# Altium PCB Mona-SD.PcbDoc
Units mm, origin at the board's own origin, x right, y up, seen from the top; angles counter-clockwise.
Board outline 152.4 x 101.6 mm, 2 copper layers (Top Layer, Bottom Layer); 8 components, 0 nets, 45 pads, 4 vias.
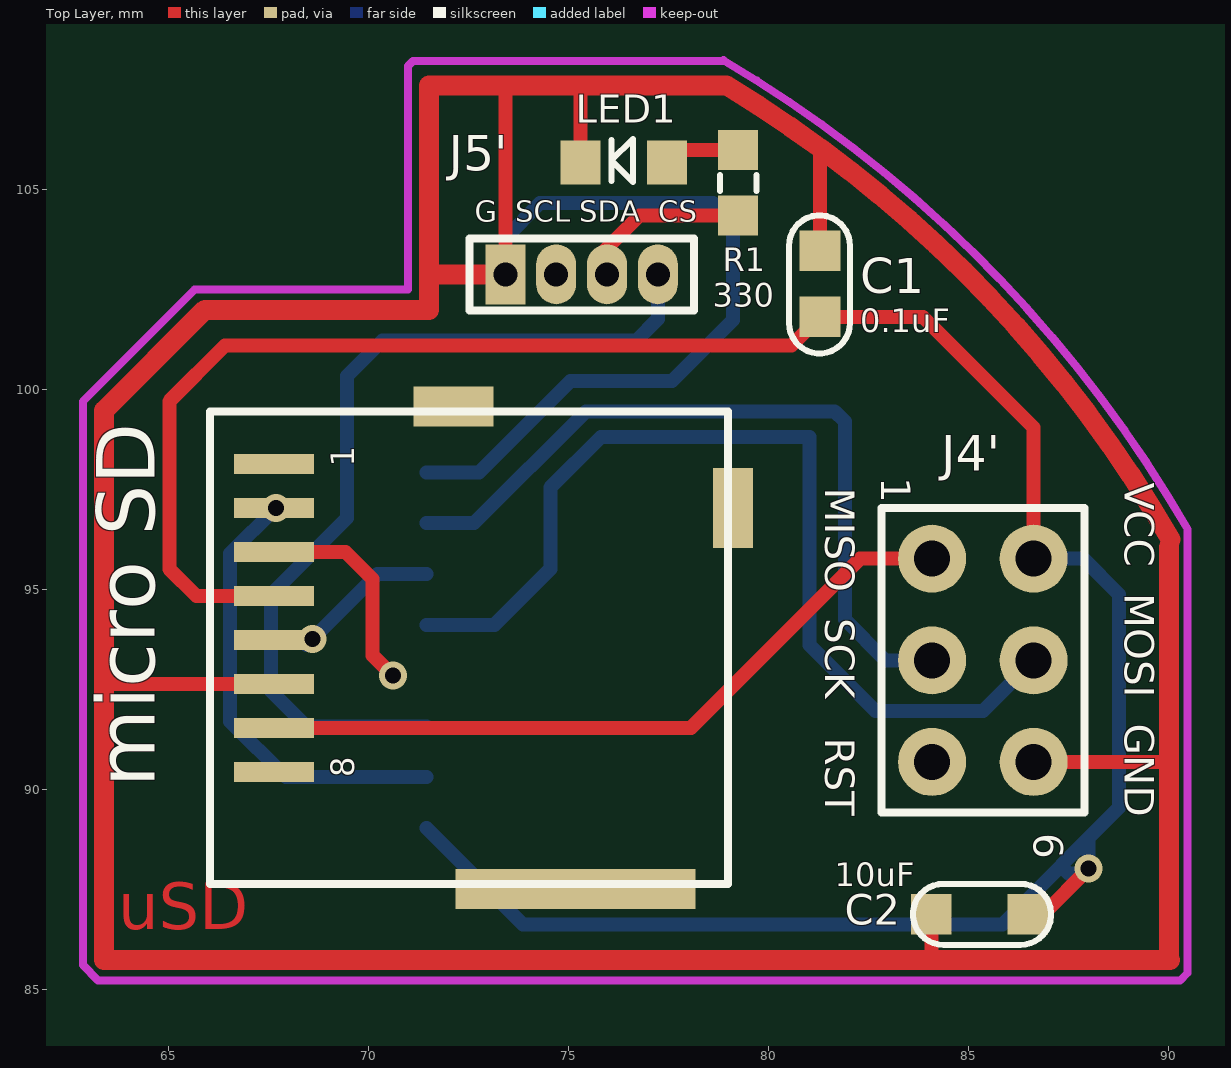
[diagram p0: Top Layer view]
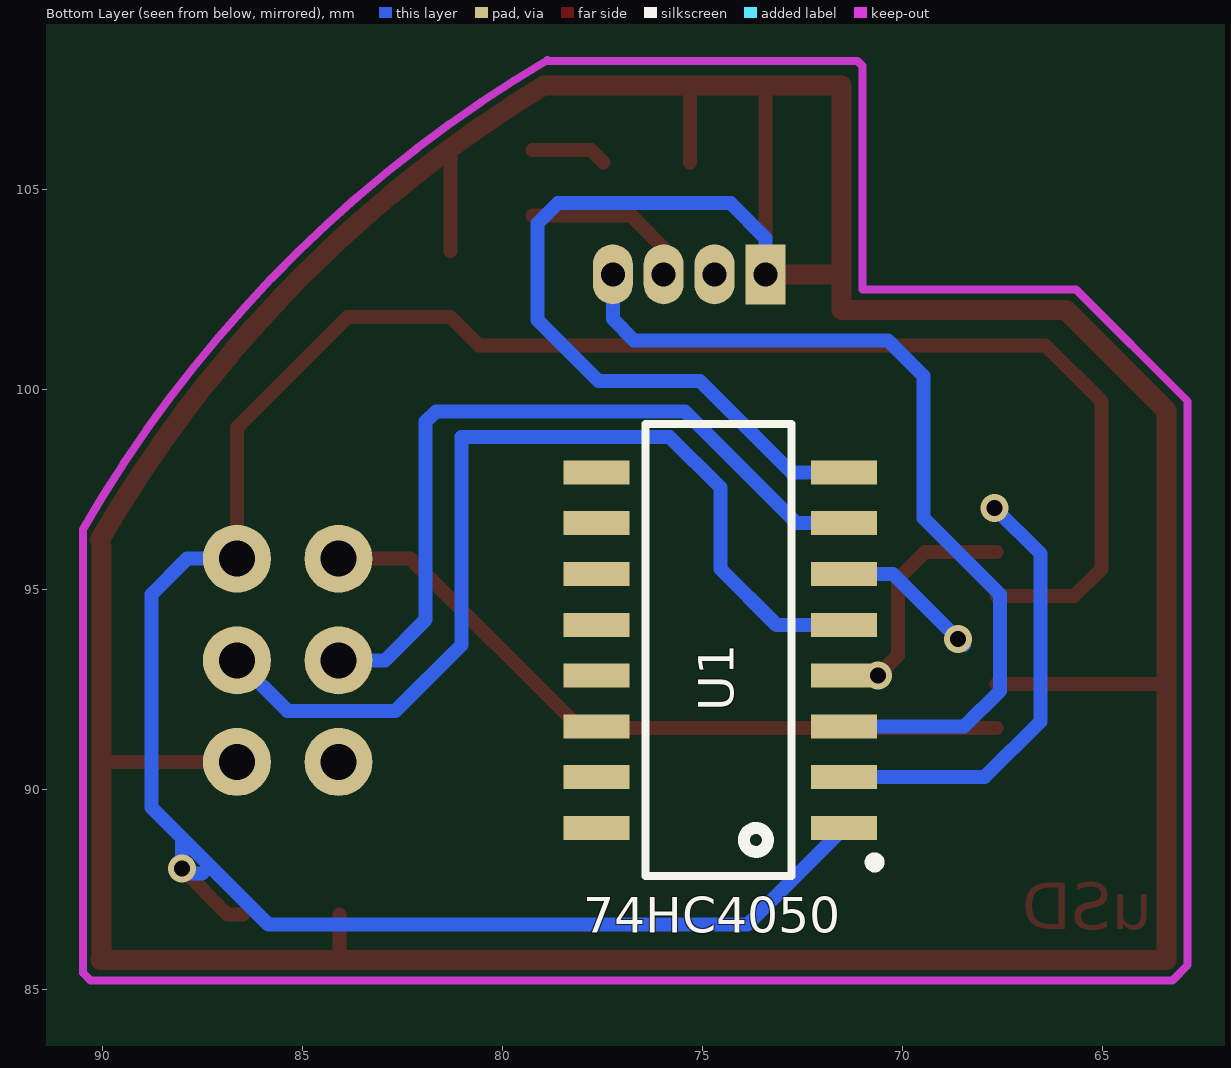
[diagram p1: Bottom Layer view, seen from below]

## Layer stack, top to bottom
Top Layer: signal copper 0.0356
Dielectric: dielectric 0.32, FR-4, Dk 4.8
Bottom Layer: signal copper 0.0356

## Board outline
25.4,25.4 177.8,25.4 177.8,127 25.4,127

## Design rules (kind name [scope] priority, off if disabled: settings)
Clearance [All] p1: gap=0.254
ComponentClearance [All] p1: gap=0.254 collisioncheckmode=3 verticalgap=0.254
PolygonConnect [All] p1: connectstyle=Relief reliefconductorwidth=0.254 reliefentries=4 polygonreliefangle="90 Angle"
RoutingVias [All] p1: holewidth=0.711 width=1.27 viastyle="Through Hole" minholewidth=0.711 minwidth=1.27 maxholewidth=0.711 maxwidth=1.27
SolderMaskExpansion [All] p1: expansion=0.102
TestPointUsage [All] p1: valid=0 allowmultiple=FALSE
Testpoint [All] p1: side=15 testpointundercomponent=TRUE minsize=1.016 maxsize=2.54 preferedsize=1.524 minholesize=0 maxholesize=1.016 preferedholesize=0.813 testpointgrid=0.025 style=1023 order=0123456789
Width [All] p1: maxlimit=0.254 minlimit=0.254 preferedwidth=0.254
18 further rules are at their usual default settings.

## Components (designator, comment, footprint, x,y, rotation, side; value= is the part's Value field where it differs from the comment)
C1 "0.1uF" 0603C#1 81.28,102.616 r90 top (schematic designator C14)
C2 "10uF" 0603C#2 85.344,86.868 r180 top (schematic designator C14)
J4' "Comment" HDR2X3 84.095,95.758 r270 top locked
J5' "G  SCL SDA  CS" MHDR1X4 73.427,102.87 r0 top locked
LED1 "LED0" 0805L 77.724,105.664 r0 top (schematic designator D4)
R1 "330" R0603(1608) 79.248,105.156 r90 top (schematic designator R46)
U1 "74HC4050" SO-16 74.168,93.472 r90 bottom
? "Comment" "PCBComponent_1 - duplicate3" 66.04,87.376 r90 top locked

## Footprints (in the part's own frame and the unit in brackets; to place one, negate y for a bottom-side part, rotate by r counter-clockwise, add the part's x,y. Pads: shape width x height; smd on the part's side, far side on the other; paste and mask are expansions set on the pad)
0603C#1 [mil]
  rect 40x40 smd: 1(-32,-0.5) 2(33,-0.5)
  silkscreen extent -68,-30 68,30
0603C#2 [mil]
  rect 40x40 smd: 1(-45,0) 2(50,0)
  silkscreen extent -68,-30 68,30
0805L [mm]
  rect 1x1.1 smd: 1(-0.254,0) 2(-2.413,0)
  silkscreen extent -1.64,-0.48 -1.11,0.58
HDR2X3 [mm] "Connector; Header; 3x2 Position"
  round 1.7 hole 0.9: 1(0,0) 2(0,2.54) 3(2.54,0) 4(2.54,2.54) 5(5.08,0) 6(5.08,2.54)
  silkscreen extent -1.27,-1.27 6.35,3.81
MHDR1X4 [mm] "Connector; Header; 4 Position"
  rect 1x1.5 hole 0.6: 1(0,0)
  oval 1x1.5 hole 0.6: 2(1.27,0) 3(2.54,0) 4(3.81,0)
  silkscreen extent -0.9,-0.9 4.71,0.9
"PCBComponent_1 - duplicate3" [mm]
  rect 0.5x2 smd: "1 x"(10.748,-1.605) "2 CS"(9.648,-1.605) "3 DI"(8.548,-1.605) "4 VDD"(7.448,-1.605) "5 SCLK"(6.348,-1.605) "6 VSS"(5.248,-1.605) "7 DO"(4.148,-1.605) "8 x"(3.048,-1.605)
  rect 1x6 smd: 10(0.127,-9.144)
  rect 2x1 smd: 10(9.652,-13.081)
  rect 1x2 smd: 10(12.192,-6.096)
  silkscreen extent 0.25,-12.95 12.07,0
R0603(1608) [mm] "Chip Resistor, Body 1.6x0.8mm, IPC Medium Density"
  rect 1x1 smd: 1(-0.82,0) 2(0.82,0)
  silkscreen extent -0.2,-0.46 0.2,0.46, body extent -0.85,-0.48 0.85,0.48, height 0.6
SO-16 [mm] "Small Outline; 16 Leads; Body Width 5.6 mm; Pitch 1.27 mm"
  rect 0.6x1.65 smd: 1(-4.445,-2.712) 2(-3.175,-2.712) 3(-1.905,-2.712) 4(-0.635,-2.712) 5(0.635,-2.712) 6(1.905,-2.712) 7(3.175,-2.712) 8(4.445,-2.712) 9(4.445,3.475) 10(3.175,3.475) 11(1.905,3.475) 12(0.635,3.475) 13(-0.635,3.475) 14(-1.905,3.475) 15(-3.175,3.475) 16(-4.445,3.475)
  silkscreen extent -5.65,-3.6 5.65,2.25

## Part data
C1 C2: library part CAP, "Capacitor"
LED1: "Typical INFRARED GaAs LED"
R1: library part "R47 0603 5%", "Resistencia SMT Generica"

## Via types
v1: diameter 0.7, hole 0.4, Top Layer to Bottom Layer, 4 vias

## Nets (pads, with @x,y where several pads share a name; then routed paths per layer and width w, separated by ;. In a path a pad name is that pad's centre, name@x,y a point inside that pad or via, vN(x,y) a via of type N, cw(c..) or ccw(c..) an arc to the next point about the centre after c; other vN are vias at no path point)
pads on no net: "?.1 x" "?.2 CS" "?.3 DI" "?.4 VDD" "?.5 SCLK" "?.6 VSS" "?.7 DO" "?.8 x" ?.10 C1.1 C1.2 C2.1 C2.2 J4'.1 J4'.2 J4'.3 J4'.4 J4'.5 J4'.6 J5'.1 J5'.2 J5'.3 J5'.4 LED1.1 LED1.2 R1.1 R1.2 U1.1 U1.2 U1.3 U1.4 U1.5 U1.6 U1.7 U1.8 U1.9 U1.10 U1.11 U1.12 U1.13 U1.14 U1.15 U1.16
copper on no net: | length 305
  Top Layer w0.35: 63.432,92.624 67.645,92.624 ; 67.645,91.524 78.062,91.524 82.296,95.758 84.095,95.758 ; 67.645,94.824 65.704,94.824 65.024,95.504 65.024,99.695 66.421,101.092 80.581,101.092 81.293,101.803 83.871,101.803 86.635,99.039 86.635,95.758 ; 67.645,95.924 69.43,95.924 70.104,95.25 70.104,93.345 v1(70.612,92.837) ; 73.427,102.87 73.427,107.481 73.533,107.587 ; 75.311,105.664 75.311,107.587 ; 75.819,102.616 75.819,103.378 76.777,104.336 79.248,104.336 ; 77.47,105.664 77.782,105.976 79.248,105.976 ; 81.293,103.454 81.293,106.032 ; 84.074,85.725 84.074,86.868 ; 86.487,86.868 86.868,86.868 v1(88.011,88.011) ; 86.635,90.678 90.022,90.678
  Top Layer w0.5: 71.519,102.87 73.427,102.87 ; 90.022,85.725 90.022,96.057 ; 90.043,85.725 63.391,85.725 63.391,99.459 65.913,101.981 71.519,101.981 71.519,107.587 78.96,107.587 cw(c62.34,80.242) 90.053,96.242
  Bottom Layer w0.35: v1(67.691,97.028) 66.548,95.885 66.548,91.694 67.945,90.297 71.456,90.297 ; v1@68.453,93.599 70.231,95.377 71.456,95.377 ; 71.456,89.027 73.869,86.614 85.852,86.614 88.773,89.535 88.773,94.869 87.884,95.758 86.635,95.758 ; 71.456,91.567 68.453,91.567 67.564,92.456 67.564,94.869 69.469,96.774 69.469,100.33 70.358,101.219 76.708,101.219 77.237,101.748 77.237,102.87 ; 71.456,94.107 73.152,94.107 74.549,95.504 74.549,97.536 75.819,98.806 81.026,98.806 81.026,93.599 82.677,91.948 85.365,91.948 86.635,93.218 86.635,93.112 ; 71.456,96.647 72.644,96.647 75.438,99.441 81.661,99.441 81.915,99.187 81.915,94.234 82.931,93.218 84.095,93.218 ; 71.456,97.917 72.771,97.917 75.057,100.203 77.597,100.203 79.121,101.727 79.121,104.14 78.613,104.648 74.295,104.648 73.427,103.78 73.427,102.87 ; 87.376,88.011 87.503,87.884 87.884,87.884 v1(88.011,88.011) ; v1(88.011,88.011) 88.011,88.773 ; v1(88.011,88.011) 88.011,88.773 ; 88.011,88.773 88.03,88.792 88.011,88.773
  other v1: 68.605,93.751

## Keep-outs
Keep-Out Layer:
  lines w0.2: 78.867,108.204 71.12,108.204 70.993,108.077 70.993,102.489 65.659,102.489 62.865,99.695 62.865,85.598 63.246,85.217 90.297,85.217 90.486,85.406 90.486,96.492 ccw(c62.34,80.242) 78.877,108.22

## Other copper
Top Layer:
  text "uSD" at 63.754,86.106 h2

## Text inside footprints (layer, text, board x,y; h text height)
J4': Top Overlay "MISO  SCK   RST" at 81.174,97.536 h1.27 r270; Top Overlay "1" at 82.571,97.79 h1.27 r270; Top Overlay "6" at 86.381,88.9 h1.27 r270; Top Overlay "VCC  MOSI  GND" at 88.667,97.663 h1.27 r270
?: Top Overlay "8                             1" at 69.85,90.297 h1 r90; Top Overlay "micro SD" at 65.151,90.043 h2.5 r90